# Altium PCB PCB1.PcbDoc (part 1 of 2)
Units mil, origin at the board's own origin, x right, y up, seen from the top; angles counter-clockwise.
Board outline 3950.01 x 3140.03 mil, 2 copper layers (Top Layer, Bottom Layer); 178 components, 190 nets, 658 pads, 218 vias.
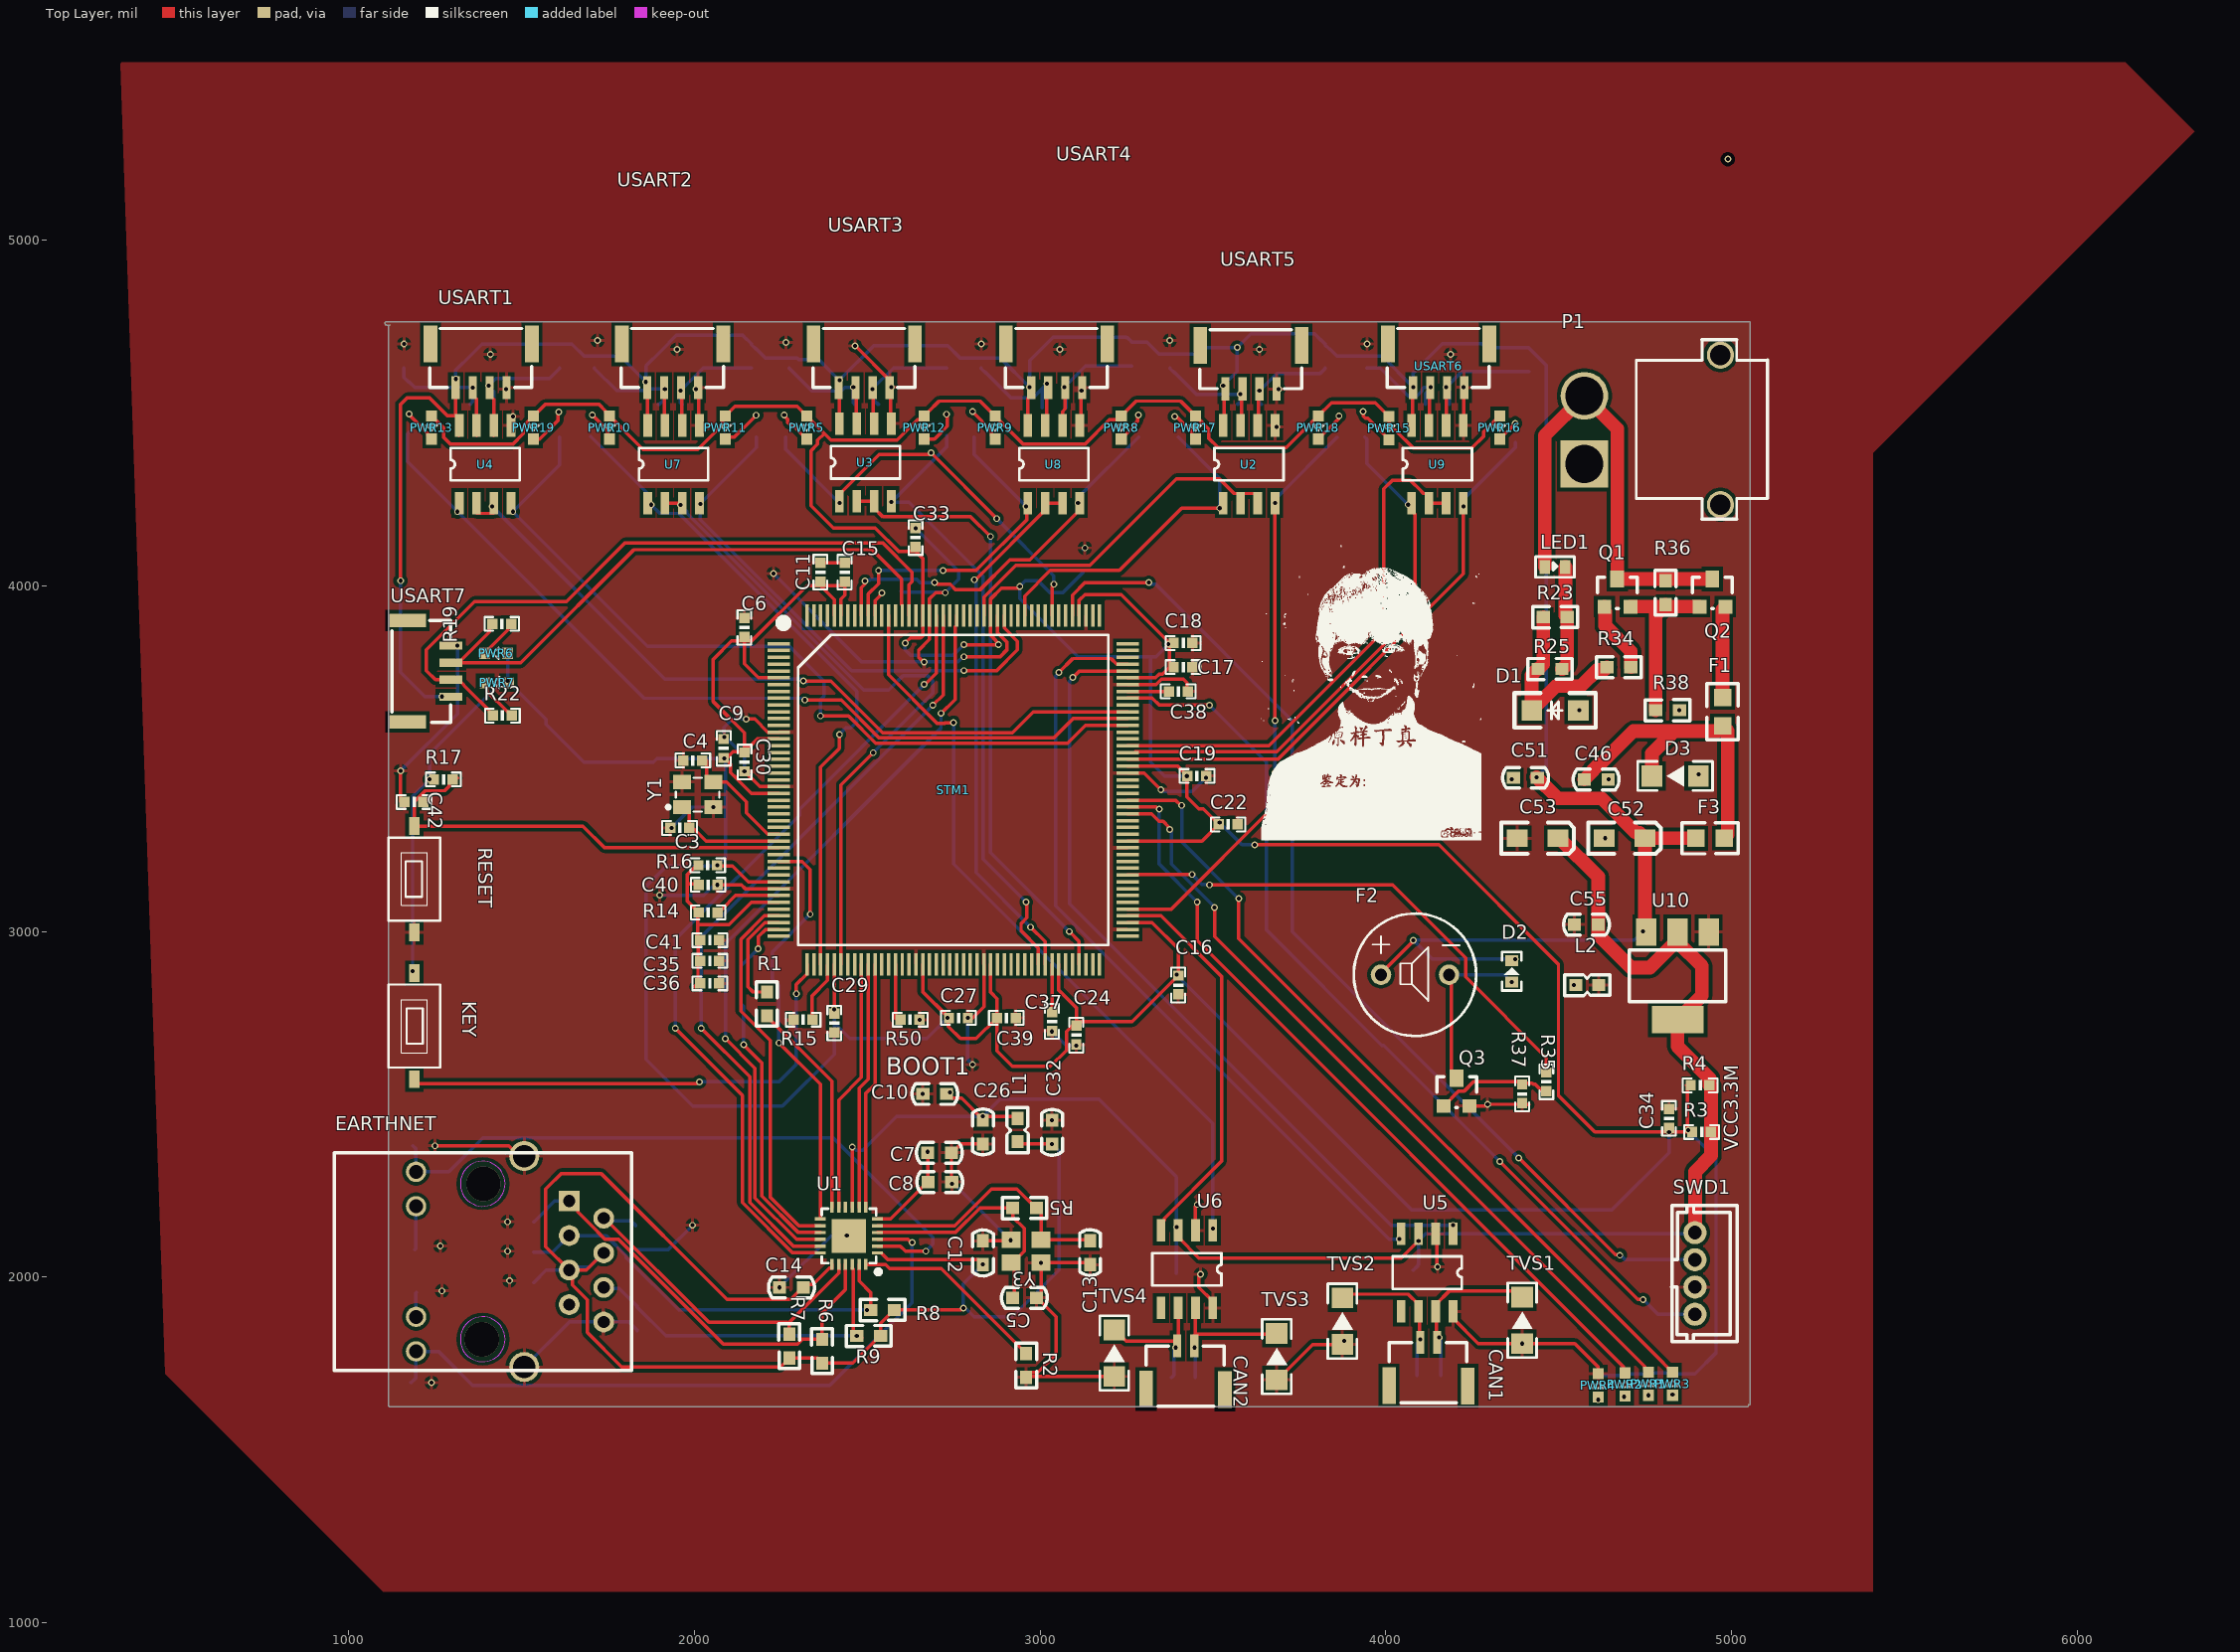
[diagram p0: Top Layer view]
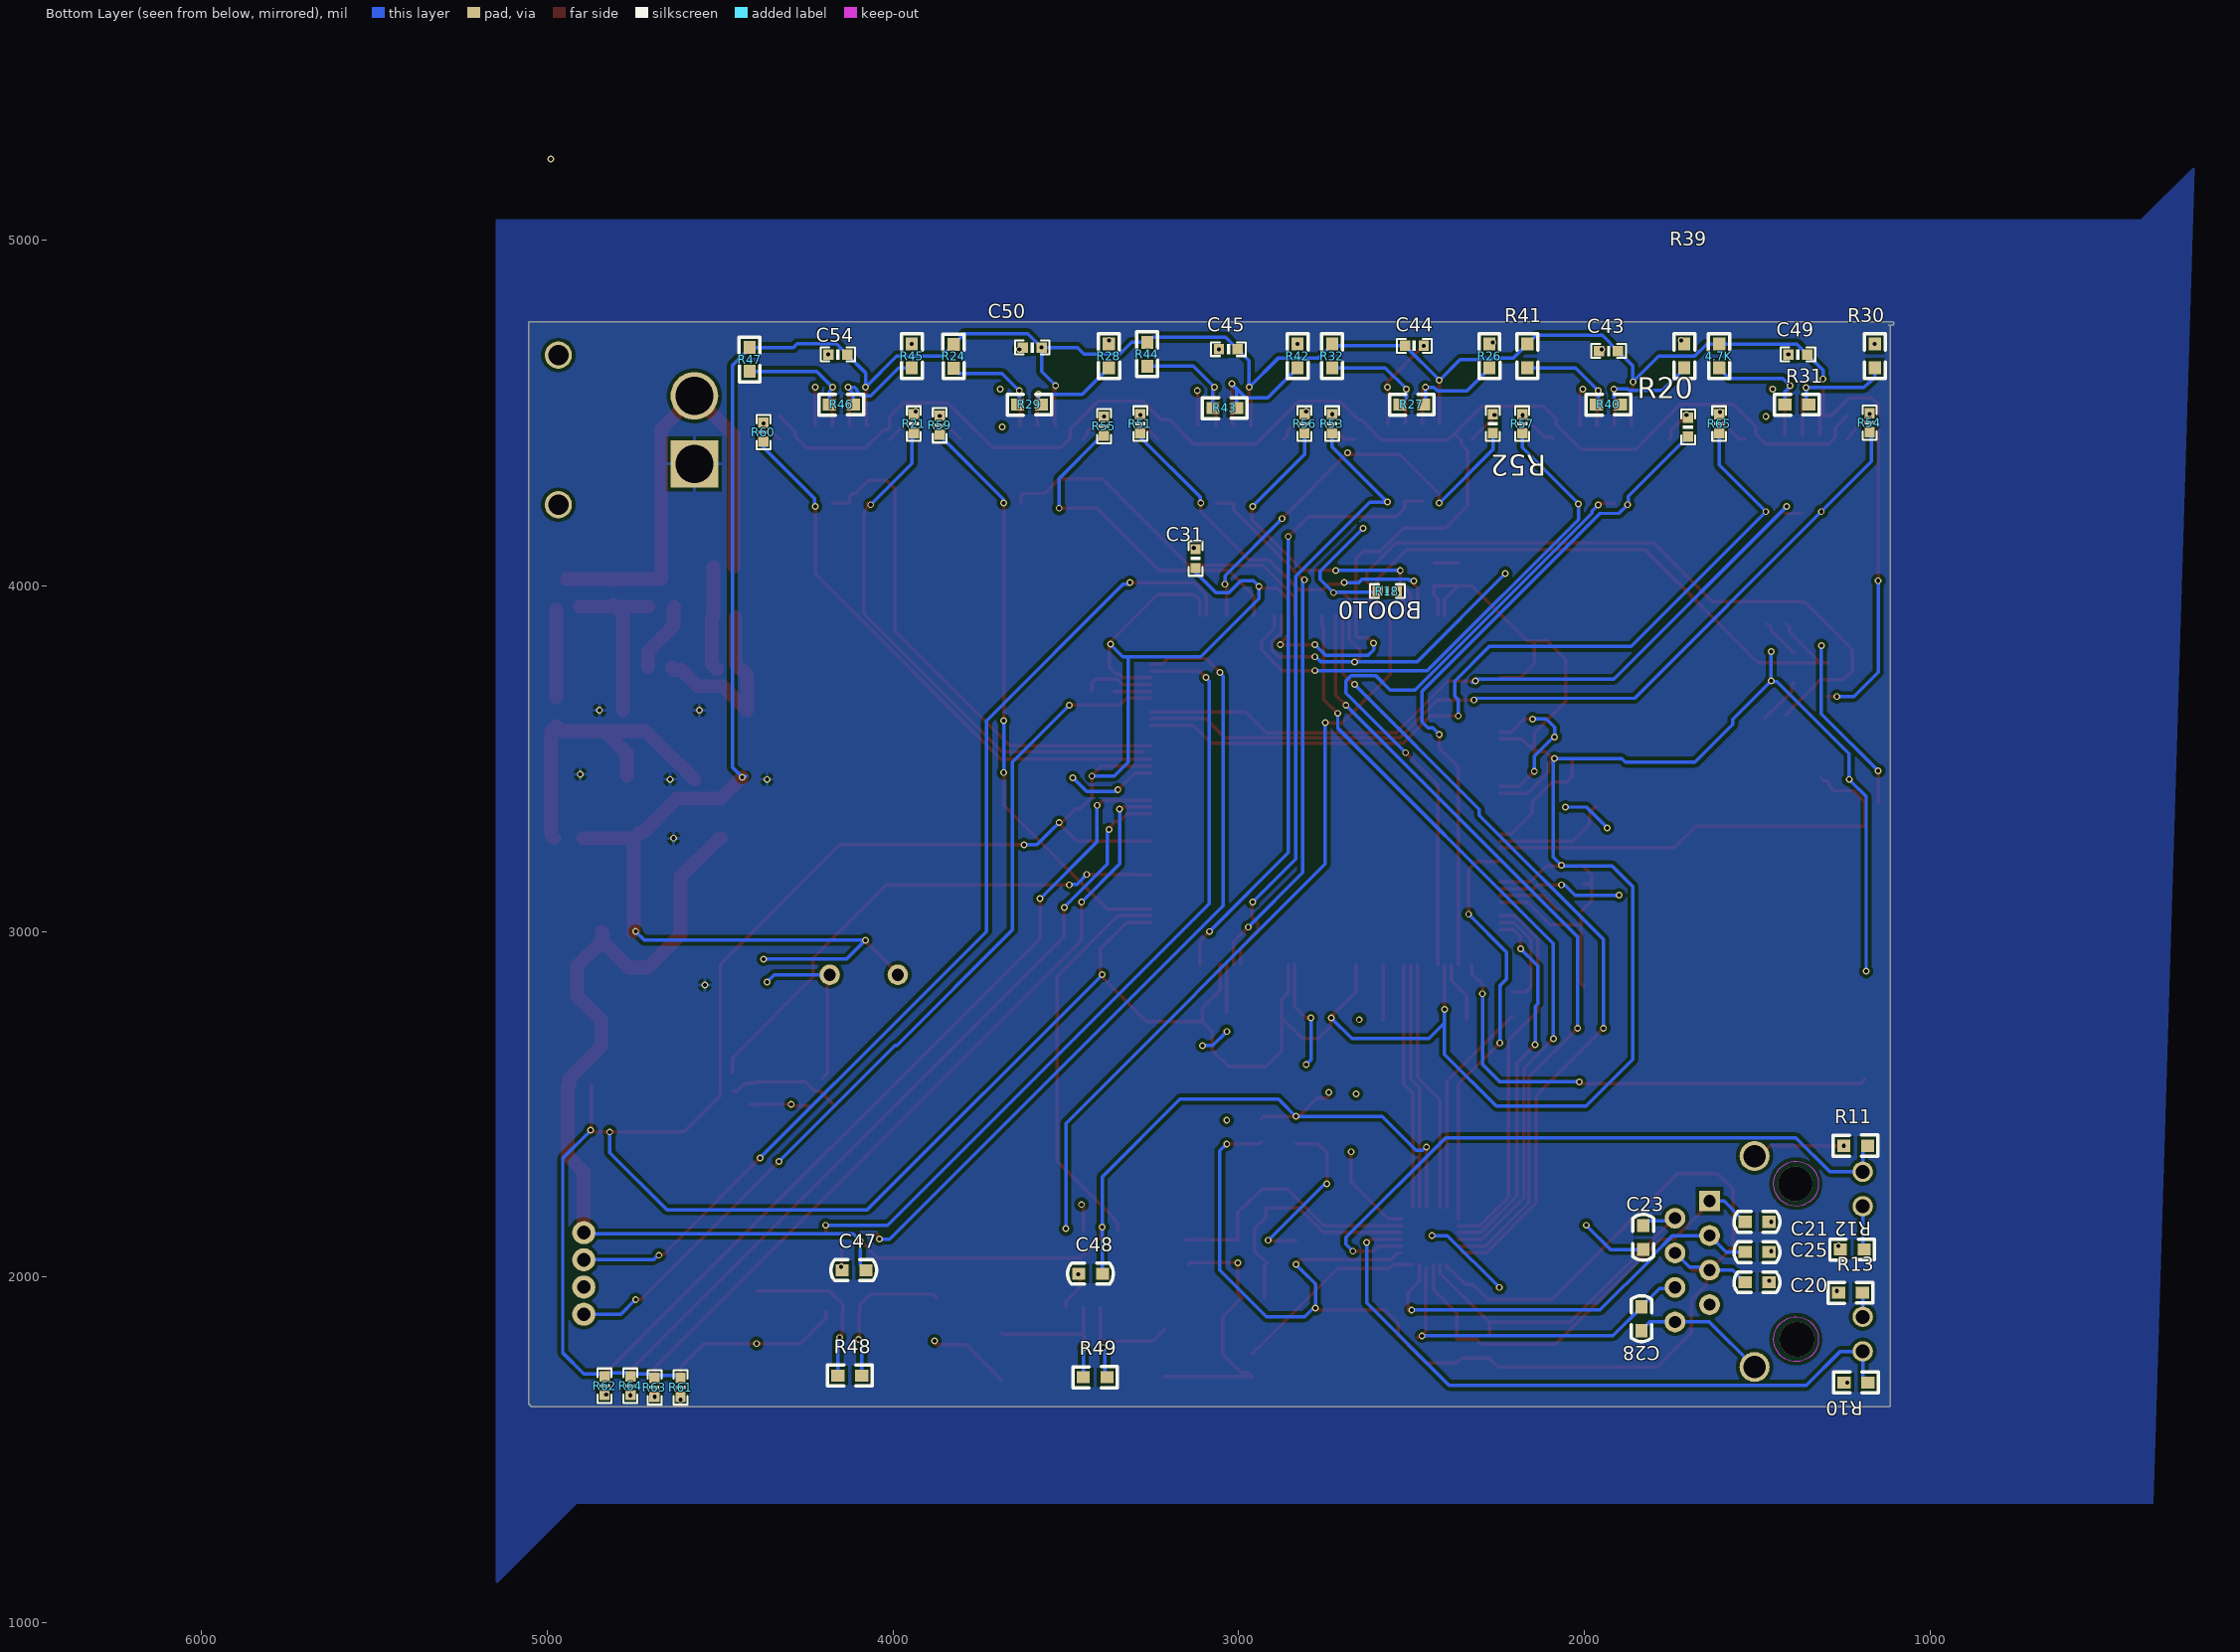
[diagram p1: Bottom Layer view, seen from below]

## Layer stack, top to bottom
Top Solder: solder mask 0.4, Solder Resist, Dk 3.5
Top Layer: signal copper 1.4
Dielectric 1: dielectric 12.6, FR-4, Dk 4.8
Bottom Layer: signal copper 1.4
Bottom Solder: solder mask 0.4, Solder Resist, Dk 3.5

## Board outline
1114.98,4750 cw(c1120,4750) 1119.45,4754.98 1110,4754.98 cw(c1110,4760) 1110,4765.02 5050,4765.02 cw(c5050,4760) 5055.02,4760 5055.02,1635 cw(c5050,1635) 5050.02,1629.98 cw(c5045,1630) 5045,1624.98 1120,1624.98 cw(c1120,1630) 1114.98,1630

## Design rules (kind name [scope] priority, off if disabled: settings)
Clearance [All] p1: gap=10 ignorepadtopadclearanceinfootprint=FALSE except(0: Arc-Hole Track-Hole SMDPad-Hole THPad-Hole Via-Hole Fill-Hole Poly-Hole Region-Hole Text-Hole; 5: Arc-Arc Arc-Track Arc-SMDPad Arc-THPad Arc-Via Track-Track Track-SMDPad Track-THPad Track-Via SMDPad-SMDPad SMDPad-THPad SMDPad-Via THPad-THPad THPad-Via)
HoleSize [All] p1: absolutevalues=TRUE maxlimit=393.7 minlimit=1 maxpercent=80.000 minpercent=20.000
HoleToHoleClearance [All] p1: gap=17.72 allowstackedmicrovias=TRUE
MinimumSolderMaskSliver [All] p1: minsoldermaskwidth=3.15
PolygonConnect [All] p1: connectstyle=Relief reliefconductorwidth=10 reliefentries=4 polygonreliefangle="90 Angle" airgapwidth=10
RoutingVias [All] p1: holewidth=28 width=50 viastyle="Through Hole" minholewidth=7.87 minwidth=50 maxholewidth=28 maxwidth=50
SilkToSilkClearance [All] p1: silktosilkclearance=0
SilkToSolderMaskClearance [IsPad] p1: minsilkscreentomaskgap=0 clearancetoexposedcopper=TRUE
SolderMaskExpansion [All] p1: expansion=4 istentingtop=FALSE
UnRoutedNet [All] p1: checkbadconnections=TRUE
Width [All] p1: maxlimit=50 minlimit=10 preferedwidth=10 minimp=50.000000 maximp=50.000000 favimp=50.000000
24 further rules are at their usual default settings.

## Components (designator, comment, footprint, x,y, rotation, side; value= is the part's Value field where it differs from the comment)
4.7K "4.7K" R_0603 1610,4700 r270 bottom
C3 "22pf" 0603P 1957.5,3300.06 r0 top
C4 "22pf" 0603P 1995.63,3495 r0 top
C5 "22pF" C_0603 2990,1940 r180 top
C6 "0.1uf" 0603P 2145,3880 r270 top
C7 "100nF" C_0603 2744,2360 r180 top
C8 "10uF" C_0603 2745,2275 r180 top
C9 "0.1uf" 0603P 2085,3530 r270 top
C10 "100nF" C_0603 2661,2530 r0 top
C11 "0.1uf" 0603P 2365,4040 r270 top
C12 "100nF" C_0603 2835,2105 r270 top
C13 "22pF" C_0603 3145,2036 r90 top
C14 "100nF" C_0603 2246,1970 r0 top
C15 "0.1uf" 0603P 2435,4040 r270 top
C16 "0.1uf" 0603P 3400,2845 r90 top
C17 "0.1uf" 0603P 3414.37,3765 r180 top
C18 "0.1uf" 0603P 3414.37,3835 r180 top
C19 "0.1uf" 0603P 3454.37,3450 r180 top
C20 "22nF" C_0603 1466,1985 r0 bottom locked
C21 "10pF" C_0603 1466,2160 r0 bottom locked
C22 "0.1uf" 0603P 3544.37,3310 r180 top
C23 "10pF" C_0603 1830,2080 r90 bottom
C24 "0.1uf" 0603P 3105,2700 r90 top
C25 "10pF" C_0603 1466,2072.5 r0 bottom locked
C26 "100nF" C_0603 2835,2385 r90 top
C27 "0.1uf" 0603P 2764.37,2750 r180 top
C28 "10pF" C_0603 1835,1845 r90 bottom
C29 "0.1uf" 0603P 2405,2735 r90 top
C30 "0.1uf" 0603P 2145,3490.63 r90 top
C31 "0.1uf" 0603P 3125,4079.37 r270 bottom
C32 "10uF" C_0603 3035,2454 r270 top
C33 "0.1uf" 0603P 2640,4140 r270 top
C34 "0.1uf" 0603P 4820,2459.37 r270 top
C35 "10UF" 0603P 2045,2915 r180 top
C36 "0.1uf" 0603P 2045,2850 r180 top
C37 "2.2UF" 0603P 3035,2740 r270 top
C38 "2.2UF" 0603P 3400,3695 r0 top
C39 "0.1uf" 0603P 2902.5,2750.06 r0 top
C40 "0.1uf" 0603P 2040,3135 r180 top
C41 "2.2UF" 0603P 2045,2975 r180 top
C42 "0.1uf" 0603P 1189.37,3375 r180 top
C43 "104" 0603P 1930,4680 r0 bottom
C44 "104" 0603P 2492.5,4695.06 r180 bottom
C45 "104" 0603P 3030,4685 r0 bottom
C46 "10uF" C_0603 4644,3440 r180 top
C47 "100nF" C_0603 4079,2020 r0 bottom
C48 "100nF" C_0603 3394,2010 r0 bottom
C49 "104" 0603P 1382.5,4669.94 r0 bottom
C50 "104" 0603P 3597.5,4689.94 r0 bottom
C51 "10uF" C_0603 4370,3445 r0 top
C52 "47uf" C_A3216 4691,3270 r180 top
C53 "47uf" C_A3216 4440,3270 r180 top
C54 "104" 0603P 4160,4670 r0 bottom
C55 "10uF" C_0603 4546,3020 r0 top
CAN1 "Header 2" BM02B-GHS-TBT 4100,1810.98 r0 top
CAN2 "Header 2" BM02B-GHS-TBT 3397.2,1800.98 r0 top
D1 "ZMM6V8" LL-34 4490,3640 r270 top
D2 "Diode" D_SOD_523 4365,2885 r90 top
D3 "SMF5.0A" D_SOD_123 4837.58,3450 r180 top
EARTHNET "RJ45" HR911105A 1387.91,2045 r90 top locked
F1 "FUSE_1A" R_0805 4974.8,3677.3 r270 top
F2 "蜂鸣器" BP_9055 4085,2875 r0 top
F3 "FUSE_0.5A" R_0805 4980,3270 r180 top
KEY "KEY_M" KEY_SOP3625 1190,2572.91 r90 top
L1 "220R,2.0A,0.05DCR" L_0603 2935,2420 r90 top
L2 "3.3uH" L_0603 4578,2845 r0 top
LED1 "LED" 0603LED 4459.5,4056.59 r0 top
P1 "P_PW_XT30_male" XT30(Male) 4575,4353.15 r90 top
PWR1 "LED" SMDLED-0603 4760,1658.07 r90 top
PWR2 "LED" SMDLED-0603 4692.5,1655.57 r90 top
PWR3 "LED" SMDLED-0603 4830,1658.07 r90 top
PWR4 "LED" SMDLED-0603 4615,1653.07 r90 top
PWR5 "LED" SMDLED-0603 2325,4491.93 r270 top
PWR6 "LED" SMDLED-0603 1460,3805 r180 top
PWR7 "LED" SMDLED-0603 1461.93,3720 r180 top
PWR8 "LED" SMDLED-0603 3235,4491.93 r270 top
PWR9 "LED" SMDLED-0603 2870,4491.93 r270 top
PWR10 "LED" SMDLED-0603 1755,4491.93 r270 top
PWR11 "LED" SMDLED-0603 2090,4491.93 r270 top
PWR12 "LED" SMDLED-0603 2665,4491.93 r270 top
PWR13 "LED" SMDLED-0603 1240,4491.93 r270 top
PWR15 "LED" SMDLED-0603 4010,4490 r270 top
PWR16 "LED" SMDLED-0603 4330,4491.93 r270 top
PWR17 "LED" SMDLED-0603 3450,4491.93 r270 top
PWR18 "LED" SMDLED-0603 3805,4491.93 r270 top
PWR19 "LED" SMDLED-0603 1535,4491.93 r270 top
Q1 "MMBT2907ALT1G" SOT_23 4633,3940 r0 top
Q2 "3401" SOT_23 4908,3940 r0 top
Q3 "9013" SOT_23 4168,2495 r0 top
R1 "510R" R_0603 2210,2825 r270 top
R2 "12.1K" R_0603 2960,1710 r90 top
R3 "0R" 0603P 4914.37,2420 r180 top
R4 "0R" 0603P 4910,2555 r180 top
R5 "1M" R_0603 2921,2200 r0 top
R6 "49.9R" R_0603 2370,1820 r270 top locked
R7 "49.9R" R_0603 2275,1835 r270 top locked
R8 "49.9R" R_0603 2510,1905 r0 top
R9 "49.9R" R_0603 2470,1830 r0 top
R10 "10K" R_0603 1180,1695 r0 bottom
R11 "10K" R_0603 1181,2380 r0 bottom
R12 "510R" R_0603 1260,2080 r180 bottom
R13 "510R" R_0603 1265,1955 r180 bottom
R14 "10R" 0603P 2040,3055 r180 top
R15 "10k" 0603P 2315,2745 r180 top
R16 "10R" 0603P 2038.99,3191.85 r0 top
R17 "10k" 0603P 1274.37,3440 r180 top
R18 "100k" 0603P 2570,3985 r0 bottom
R19 "4.7K" 0603P 1443,3890 r180 top
R20 "4.7K" 0603P 1700,4460 r270 bottom
R21 "4.7K" 0603P 3940,4470 r270 bottom
R22 "4.7K" 0603P 1445,3625 r180 top
R23 "120Ω" R_0603 4456,3910 r0 top
R24 "4.7K" R_0603 3825,4699 r270 bottom
R25 "120Ω" R_0603 4441,3760 r0 top
R26 "4.7K" R_0603 2275,4631 r90 bottom
R27 "120Ω" R_0603 2534,4525 r180 bottom
R28 "4.7K" R_0603 3376,4631 r90 bottom
R29 "120Ω" R_0603 3640,4525 r180 bottom
R30 "4.7K" R_0603 1160,4631 r90 bottom
R31 "120Ω" R_0603 1420,4525 r180 bottom
R32 "4.7K" R_0603 2730,4700 r270 bottom
R34 "23.7K" R_0603 4640,3765 r0 top
R35 "1K" 0603P 4465,2565 r270 top
R36 "23.7K" R_0603 4810,4015 r270 top
R37 "10K" 0603P 4395,2530 r90 top
R38 "23.7K" R_0603 4850,3640 r180 top
R39 "4.7K" R_0603 1711,4631 r90 bottom
R40 "120Ω" R_0603 1965,4525 r180 bottom
R41 "4.7K" R_0603 2165,4700 r270 bottom
R42 "4.7K" R_0603 2830,4631 r90 bottom
R43 "120Ω" R_0603 3075,4515 r180 bottom
R44 "4.7K" R_0603 3265,4705 r270 bottom
R45 "4.7K" R_0603 3946,4631 r90 bottom
R46 "120Ω" R_0603 4184,4525 r180 bottom
R47 "4.7K" R_0603 4415,4690 r270 bottom
R48 "120Ω" R_0603 4091,1715 r0 bottom
R49 "120Ω" R_0603 3381,1710 r0 bottom
R50 "100k" 0603P 2624.37,2745 r180 top
R51 "4.7K" 0603P 3285,4470 r270 bottom
R52 "4.7K" 0603P 2265,4470 r270 bottom
R53 "4.7K" 0603P 2730,4470 r270 bottom
R54 "4.7K" 0603P 1174.94,4472.5 r270 bottom
R55 "4.7K" 0603P 3389.94,4462.5 r270 bottom
R56 "4.7K" 0603P 2810,4470 r270 bottom
R57 "4.7K" 0603P 2180,4470 r270 bottom
R59 "4.7K" 0603P 3865,4465 r270 bottom
R60 "4.7K" 0603P 4375,4445 r270 bottom
R61 "10k" 0603P 4615,1680.63 r90 bottom
R62 "10k" 0603P 4835,1685.63 r90 bottom
R63 "10k" 0603P 4690,1680.63 r90 bottom
R64 "10k" 0603P 4760,1685.63 r90 bottom
R65 "4.7K" 0603P 1610,4470 r270 bottom
RESET "KEY_M" KEY_SOP3625 1190,3305 r270 top
STM1 "STM32H743IIT6" LQFP176 2244.67,3832.78 r0 top locked
SWD1 "Header 4" HDR_2.0_4pin 4895,1892.52 r90 top
TVS1 "TVS" D_SOD_123 4395,1875 r90 top
TVS2 "TVS" D_SOD_123 3875,1872.58 r90 top
TVS3 "TVS" D_SOD_123 3685,1770 r90 top
TVS4 "TVS" D_SOD_123 3215,1780 r90 top
U1 "LAN8720A" QFN24 2447.28,2119.21 r180 top
U2 "SP3485" SOP-8 3530,4240 r90 top
U3 "SP3485" SOP-8 2420,4245.59 r90 top
U4 "SP3485" SOP-8 1320,4240 r90 top
U5 "TJA1050" SOP-8 4195,2125 r270 top
U6 "TJA1050" SOP-8 3500,2135 r270 top
U7 "SP3485" SOP-8 1865,4240 r90 top
U8 "SP3485" SOP-8 2965,4240 r90 top
U9 "SP3485" SOP-8 4075,4240 r90 top
U10 "1117-3.3" SOT_223 4846.88,2868.54 r180 top
USART1 "Header 4" BM04B-GHS-TBT 1530,4700 r180 top locked
USART2 "Header 4" BM04B-GHS-TBT 2084,4700 r180 top locked
USART3 "Header 4" BM04B-GHS-TBT 2638,4700 r180 top locked
USART4 "Header 4" BM04B-GHS-TBT 3195,4700 r180 top locked
USART5 "Header 4" BM04B-GHS-TBT 3757.05,4695.98 r180 top locked
USART6 "Header 4" BM04B-GHS-TBT 4300,4700 r180 top
USART7 "Header 4" BM04B-GHS-TBT 1170,3900 r270 top
Y1 "25Mhz" XTAL3225 1964.45,3360 r0 top
Y3 "25Mhz" XTAL_3225 2960,2075 r0 top

## Footprints (in the part's own frame and the unit in brackets; to place one, negate y for a bottom-side part, rotate by r counter-clockwise, add the part's x,y. Pads: shape width x height; smd on the part's side, far side on the other; paste and mask are expansions set on the pad)
0603LED [mil]
  rect 30x40 smd: 1(0.5,-1.59) 2(60.5,-1.59)
  silkscreen extent -26,-32 87,28, body extent -2,-16 62,16, height 24
0603P [mil]
  rect 30x30 smd: 1(-27,0) 2(27.5,-0.06)
  silkscreen extent -50,-20 50,20
BM02B-GHS-TBT [mm]
  rect 1x2.7 smd: 0(-2.286,-3.175) 0(3.5,-3.2)
  rect 0.6x1.7 smd: 1(1.25,0) 2(0,0)
  silkscreen extent -2.29,-4.44 3.43,0
BM04B-GHS-TBT [mm]
  rect 1x2.7 smd: 0(0,0) 0(7.45,0)
  rect 0.6x1.7 smd: 1(5.6,3.2) 2(4.35,3.2) 3(3.1,3.2) 4(1.85,3.2)
  silkscreen extent 0,-1.14 7.49,3.18
BP_9055 [mm]
  round 1.5 hole 0.9: 1(-2.5,0) 2(2.5,0)
  silkscreen extent -4.5,-4.5 4.5,4.5, body extent -4.5,-4.5 4.5,4.5, height 6
C_0603 [mil] "1608"
  rect 38x35 smd: 1(0,0) 2(69,0)
  silkscreen extent -31,-30 101,30, body extent 4,-16 67,16, height 12
C_A3216 [mil]
  rect 60x51.18 smd: 1(-59,0) 2(59,0)
  silkscreen extent -105,-45 105,45, body extent -63,-31 63,32, height 63
D_SOD_123 [mm] "1206大小，二极管"
  rect 1.52x1.6 smd: 1(-1.713,0) 2(1.712,0)
  silkscreen extent -2.74,-1.07 2.74,1.07, body extent -1.87,-0.75 2.13,0.75, height 1.5
D_SOD_523 [mm] "0603大小，二极管"
  rect 0.8x0.96 smd: 1(-0.79,0) 2(0.79,0)
  silkscreen extent -1.42,-0.71 1.42,0.71
HDR_2.0_4pin [mm]
  round 1.7 hole 1: 1(6,0) 2(4,0) 3(2,0) 4(0,0)
  silkscreen extent -2,-3.1 8,1.71
HR911105A [mil]
  rect 60x60 hole 35: 1(175.2,-250)
  round 60 hole 35: 2(125.2,-350) 3(75.2,-250) 4(25.2,-350) 5(-24.8,-250) 6(-74.8,-350) 7(-124.8,-250) 8(-174.8,-350)
  round 59.06 hole 40.16: 9(259.84,192.91) 12(-259.84,192.91)
  round 59.05 hole 40.16: 10(160,192.91) 11(-160,192.91)
  round 86.61 hole 64.96: 13(305.12,-120) 14(-305.12,-120)
  Keep-Out Layer circle w2: c225.04,0 r64.96
  Keep-Out Layer circle w2: c-224.96,0 r64.96
  silkscreen extent -315,-430 315,430
KEY_SOP3625 [mm]
  rect 1.3x0.8 smd: 1(0,0) 2(7.8,0)
  silkscreen extent 0.85,-1.9 6.95,1.9
L_0603 [mil]
  rect 38x35 smd: 1(-28,0) 2(38.87,0)
  silkscreen extent -60,-31 71,30, body extent -24,-15 36,15, height 20
LL-34 [mm]
  rect 1.5x1.5 smd: 1(0,1.714) 2(0,-1.714)
  silkscreen extent -1.27,-2.98 1.27,2.98, body extent -0.73,-1.75 0.72,1.75, height 1.43
LQFP176 [mm]
  rect 1.65x0.254 smd: 1(0,0) 2(0,-0.5) 3(0,-1) 4(0,-1.5) 5(0,-2) 6(0,-2.5) 7(0,-3) 8(0,-3.5) 9(0,-4) 10(0,-4.5) 11(0,-5) 12(0,-5.5) 13(0,-6) 14(0,-6.5) 15(0,-7) 16(0,-7.5) 17(0,-8) 18(0,-8.5) 19(0,-9) 20(0,-9.5) 21(0,-10) 22(0,-10.5) 23(0,-11) 24(0,-11.5) 25(0,-12) 26(0,-12.5) 27(0,-13) 28(0,-13.5) 29(0,-14) 30(0,-14.5) 31(0,-15) 32(0,-15.5) 33(0,-16) 34(0,-16.5) 35(0,-17) 36(0,-17.5) 37(0,-18) 38(0,-18.5) 39(0,-19) 40(0,-19.5) 41(0,-20) 42(0,-20.5) 43(0,-21) 44(0,-21.5) 89(25.631,-21.5) 90(25.631,-21) 91(25.631,-20.5) 92(25.631,-20) 93(25.631,-19.5) 94(25.631,-19) 95(25.631,-18.5) 96(25.631,-18) 97(25.631,-17.5) 98(25.631,-17) 99(25.631,-16.5) 100(25.631,-16) 101(25.631,-15.5) 102(25.631,-15) 103(25.631,-14.5) 104(25.631,-14) 105(25.631,-13.5) 106(25.631,-13) 107(25.631,-12.5) 108(25.631,-12) 109(25.631,-11.5) 110(25.631,-11) 111(25.631,-10.5) 112(25.631,-10) 113(25.631,-9.5) 114(25.631,-9) 115(25.631,-8.5) 116(25.631,-8) 117(25.631,-7.5) 118(25.631,-7) 119(25.631,-6.5) 120(25.631,-6) 121(25.631,-5.5) 122(25.631,-5) 123(25.631,-4.5) 124(25.631,-4) 125(25.631,-3.5) 126(25.631,-3) 127(25.631,-2.5) 128(25.631,-2) 129(25.631,-1.5) 130(25.631,-1) 131(25.631,-0.5) 132(25.631,0)
  rect 0.254x1.65 smd: 45(2.065,-23.566) 46(2.566,-23.566) 47(3.066,-23.566) 48(3.565,-23.566) 49(4.066,-23.566) 50(4.565,-23.566) 51(5.066,-23.566) 52(5.565,-23.566) 53(6.066,-23.566) 54(6.565,-23.566) 55(7.066,-23.566) 56(7.565,-23.566) 57(8.066,-23.566) 58(8.565,-23.566) 59(9.066,-23.566) 60(9.565,-23.566) 61(10.066,-23.566) 62(10.565,-23.566) 63(11.066,-23.566) 64(11.565,-23.566) 65(12.066,-23.566) 66(12.565,-23.566) 67(13.066,-23.566) 68(13.565,-23.566) 69(14.066,-23.566) 70(14.565,-23.566) 71(15.066,-23.566) 72(15.566,-23.566) 73(16.066,-23.566) 74(16.566,-23.566) 75(17.065,-23.566) 76(17.566,-23.566) 77(18.065,-23.566) 78(18.566,-23.566) 79(19.065,-23.566) 80(19.566,-23.566) 81(20.065,-23.566) 82(20.566,-23.566) 83(21.065,-23.566) 84(21.566,-23.566) 85(22.065,-23.566) 86(22.566,-23.566) 87(23.065,-23.566) 88(23.566,-23.566) 133(23.566,2.065) 134(23.065,2.065) 135(22.566,2.065) 136(22.065,2.065) 137(21.566,2.065) 138(21.065,2.065) 139(20.566,2.065) 140(20.065,2.065) 141(19.566,2.065) 142(19.065,2.065) 143(18.566,2.065) 144(18.065,2.065) 145(17.566,2.065) 146(17.065,2.065) 147(16.566,2.065) 148(16.066,2.065) 149(15.566,2.065) 150(15.066,2.065) 151(14.565,2.065) 152(14.066,2.065) 153(13.565,2.065) 154(13.066,2.065) 155(12.565,2.065) 156(12.066,2.065) 157(11.565,2.065) 158(11.066,2.065) 159(10.565,2.065) 160(10.066,2.065) 161(9.565,2.065) 162(9.066,2.065) 163(8.565,2.065) 164(8.066,2.065) 165(7.565,2.065) 166(7.066,2.065) 167(6.565,2.065) 168(6.066,2.065) 169(5.565,2.065) 170(5.066,2.065) 171(4.565,2.065) 172(4.066,2.065) 173(3.565,2.065) 174(3.066,2.065) 175(2.566,2.065) 176(2.065,2.065)
  silkscreen extent 0.04,-22.15 24.22,1.82
QFN24 [mm]
  rect 0.8x0.25 smd: 1(-2.101,1.25) 2(-2.101,0.75) 3(-2.101,0.25) 4(-2.101,-0.25) 5(-2.101,-0.75) 6(-2.101,-1.25) 13(2.101,-1.25) 14(2.101,-0.75) 15(2.101,-0.25) 16(2.101,0.25) 17(2.101,0.75) 18(2.101,1.25)
  rect 0.25x0.8 smd: 7(-1.25,-2.101) 8(-0.75,-2.101) 9(-0.25,-2.101) 10(0.25,-2.101) 11(0.75,-2.101) 12(1.25,-2.101) 19(1.25,2.101) 20(0.75,2.101) 21(0.25,2.101) 22(-0.25,2.101) 23(-0.75,2.101) 24(-1.25,2.101)
  rect 2.5x2.5 smd: 25(0,0)
  silkscreen extent -2.31,-2 2,2.79
R_0603 [mil] "1608"
  rect 38x35 smd: 1(0,0) 2(69,0)
  silkscreen extent -30,-31 99,30, body extent 4,-16 66,16, height 18
R_0805 [mil] "2012"
  rect 50x50 smd: 1(0,0) 2(82.3,0.2)
  silkscreen extent -40,-45 122,45, body extent 1,-24 80,25, height 22
SMDLED-0603 [mil]
  rect 32x32 smd: 1(0,0) 2(66.93,0)
  silkscreen extent 26,-17 42,17
SOP-8 [mil]
  rect 65x25 smd: 1(0,0) 2(0,-50) 3(0,-100) 4(0,-150) 5(224.41,-150) 6(224.41,-100) 7(224.41,-50) 8(224.41,0)
  silkscreen extent 65,-175 159,25
SOT_23 [mil]
  rect 40x40 smd: 1(0,0) 2(75,0)
  rect 40x50 smd: 3(37,80)
  silkscreen extent -20,-5 95,85, body extent -20,-12 94,99, height 47
SOT_223 [mil]
  rect 59x79 smd: 1(-88,-130) 2(2.55,-130) 3(93.1,-130)
  rect 150x79 smd: 2(1.88,123.54)
  silkscreen extent -137,-78 143,72, body extent -126,-139 130,135, height 67
XT30(Male) [mm] "XT30公头"
  round 2 hole 1.5: 0(-3,-10) 0(8,-10)
  round 3.5 hole 2.8: 1(5,0)
  rect 3.5x3.5 hole 2.8: 2(0,0)
  silkscreen extent -4.06,-13.47 9.14,-3.82, body extent -4.11,-13.49 9.19,1.52, height 5
XTAL3225 [mm]
  rect 1.3x1.05 smd: 1(0,0) 2(2.3,0) 3(2.3,1.85) 4(0,1.85)
  silkscreen extent -1.14,-0.33 2.74,2.17
XTAL_3225 [mm]
  rect 1.4x1.2 smd: 1(-1.1,-0.85) 2(1.1,-0.85) 3(1.1,0.85) 4(-1.1,0.85)
  body extent -1.6,-1.25 1.6,1.25, height 0.7

## Part data
4.7K R23 R24 R25 R26 R27 R28 R29 R30 R31 R32 R39 R40 R41 R42 R43 R44 R45 R46 R47 R48 R49: library part Res2, "Resistor", LatestRevisionDate=17-Jul-2002, LatestRevisionNote="Re-released for DXP Platform.", PackageReference=AXIAL-0.4, Published=8-Jun-2000, Publisher="Altium Limited"
C3 C4 C5 C6 C7 C8 C9 C10 C11 C12 C13 C14 C15 C16 C17 C18 C19 C20 C21 C22 C23 C24 C25 C26 C27 C28 C29 C30 C31 C32 C33 C34 C35 C36 C37 C38 C39 C40 C41 C42 C43 C44 C45 C49 C50 C54: library part C
C46 C51 C55: library part Cap_4, "Capacitor", LatestRevisionDate=17-Jul-2002, LatestRevisionNote="Re-released for DXP Platform.", PackageDescription="Radial Cap, Thru-Hole; 2 Leads; 0.3 in Pin Spacing", PackageReference=RAD-0.3, Published=8-Jun-2000, Publisher="Altium Limited"
C47 C48: library part Cap_2, "Capacitor", LatestRevisionDate=17-Jul-2002, LatestRevisionNote="Re-released for DXP Platform.", PackageDescription="Radial Cap, Thru-Hole; 2 Leads; 0.3 in Pin Spacing", PackageReference=RAD-0.3, Published=8-Jun-2000, Publisher="Altium Limited"
C52 C53: library part "Cap Pol", "Polarized Capacitor (Radial)", LatestRevisionDate=17-Jul-2002, LatestRevisionNote="Re-released for DXP Platform.", PackageReference=RB7.6-15, Published=8-Jun-2000, Publisher="Altium Limited"
CAN1 CAN2: "Header, 2-Pin", LatestRevisionDate=17-Jul-2002, LatestRevisionNote="Re-released for DXP Platform.", Publisher="Altium Limited"
D1: library part Diode_1, "Default Diode", Code_JEDEC=DO-214-AB, LatestRevisionDate=17-Jul-2002, LatestRevisionNote="Re-released for DXP Platform.", PackageDescription="DO-214-AB/SMC; 2 C-Bend Leads; Body 7.9 x 5.9 mm, inc. leads (LxW)", PackageReference=SMC, PackageVersion=Sep-1996, Published=8-Jun-2000, Publisher="Altium Limited"
D2: "Default Diode", Code_JEDEC=DO-214-AB, LatestRevisionDate=17-Jul-2002, LatestRevisionNote="Re-released for DXP Platform.", PackageDescription="DO-214-AB/SMC; 2 C-Bend Leads; Body 7.9 x 5.9 mm, inc. leads (LxW)", PackageReference=SMC, PackageVersion=Sep-1996, Published=8-Jun-2000, Publisher="Altium Limited"
D3: library part Diode_2, "Default Diode", Code_JEDEC=DO-214-AB, LatestRevisionDate=17-Jul-2002, LatestRevisionNote="Re-released for DXP Platform.", PackageDescription="DO-214-AB/SMC; 2 C-Bend Leads; Body 7.9 x 5.9 mm, inc. leads (LxW)", PackageReference=SMC, PackageVersion=Sep-1996, Published=8-Jun-2000, Publisher="Altium Limited"
EARTHNET: library part HR911105
F1: library part FUSE_1, "Fuse", LatestRevisionDate=17-Jul-2002, LatestRevisionNote="Re-released for DXP Platform.", PackageDescription="Thru-Hole; 2 Leads", PackageReference=PIN-W2/E2.8, Published=8-Jun-2000, Publisher="Altium Limited"
F3: library part FUSE, "Fuse", LatestRevisionDate=17-Jul-2002, LatestRevisionNote="Re-released for DXP Platform.", PackageDescription="Thru-Hole; 2 Leads", PackageReference=PIN-W2/E2.8, Published=8-Jun-2000, Publisher="Altium Limited"
L1: library part L
L2: library part Inductor, "Inductor", Code_IEC=1005, Code_JEITA=0402, LatestRevisionDate=17-Jul-2002, LatestRevisionNote="Re-released for DXP Platform.", PackageReference=0402-A, Published=8-Jun-2000, Publisher="Altium Limited"
LED1: "Typical INFRARED GaAs LED", LatestRevisionDate=08-Jul-2005, LatestRevisionNote="Mech Layer 1 removed.", PackageDescription="LED; 2 Leads", PackageReference=LED-0, Published=8-Jun-2000, Publisher="Altium Limited"
P1: "XT30_pw_m  / XT30母头电源输入"
Q1: library part PNP, "PNP Bipolar Transistor", LatestRevisionDate=29-May-2009, LatestRevisionNote="IPC-7351 Footprint Added.", PackageDescription="3-Pin SOT-23 Package 0.95 mm Pitch, 2.4 mm Lead Span", PackageReference=SOT-23B, PackageVersion=Aug-1999, Published=8-Jun-2000, Publisher="Altium Limited"
Q2: library part MOSFET_P, "HEXFET Power MOSFET", ComponentLink1Description="Manufacturer Link", ComponentLink1URL=http://www.irf.com/, ComponentLink2Description=Datasheet, ComponentLink2URL=http://www.irf.com/product-info/datasheets/data/irf1010ns.pdf, DatasheetVersion=May-1999, LatestRevisionDate=20-Nov-2009, LatestRevisionNote="IPC-7351 Footprint Added.", PackageDescription="3-Pin Transistor Outline Package 2.54 mm Pitch, 15.1 mm Lead Span", PackageReference=D2PAK, Published=8-Jun-2000, Publisher="Altium Limited"
Q3: library part NPN, "NPN Bipolar Transistor", Code_JEDEC=TO-226-AA, LatestRevisionDate=17-Jul-2002, LatestRevisionNote="Re-released for DXP Platform.", PackageReference=TO-226, Published=8-Jun-2000, Publisher="Altium Limited"
R1 R2 R3 R4 R5 R6 R7 R8 R9 R10 R11 R12 R13 R14 R15 R16 R17 R18 R19 R20 R21 R22 R35 R37 R50 R51 R52 R53 R54 R55 R56 R57 R59 R60 R61 R62 R63 R64 R65: library part R
R34 R36 R38: library part Res2_1, "Resistor", LatestRevisionDate=17-Jul-2002, LatestRevisionNote="Re-released for DXP Platform.", PackageReference=AXIAL-0.4, Published=8-Jun-2000, Publisher="Altium Limited"
SWD1 USART1 USART2 USART3 USART4 USART5 USART6 USART7: "Header, 4-Pin", LatestRevisionDate=17-Jul-2002, LatestRevisionNote="Re-released for DXP Platform.", Publisher="Altium Limited"
TVS1 TVS2 TVS3 TVS4: library part Diode, "Default Diode", Code_JEDEC=DO-214-AB, LatestRevisionDate=17-Jul-2002, LatestRevisionNote="Re-released for DXP Platform.", PackageDescription="DO-214-AB/SMC; 2 C-Bend Leads; Body 7.9 x 5.9 mm, inc. leads (LxW)", PackageReference=SMC, PackageVersion=Sep-1996, Published=8-Jun-2000, Publisher="Altium Limited"
U1: library part LAN8720, "ETH PHY"
U2 U3 U4 U7 U8 U9: library part MAX3485
U5 U6: library part SN65HVD230D
U10: library part LM1117-3.3, "800mA Low-Dropout Linear Regulator, 3-pin TO-220", Manufacturer="National Semiconductor", PackageTopMarking=NSUZXYTTE#*LM1117T*3.3, PartNumber=LM1117T-3.3, PowerWise=N, Supplier Part Number 1=9485813, ComponentLink1Description="LM1117 Datasheet", ComponentLink1URL=http://www.national.com/ds/LM/LM1117.pdf, ComponentLink2Description="LM1117 Web Page", ComponentLink2URL=http://www.national.com/pf/LM/LM1117.html, ComponentLink3Description="T03B Package Page", ComponentLink3URL=http://www.national.com/packaging/folders/t03b.html, CompType="LDO IC", DatasheetVersion=Apr-2006, PackageDescription="TO-220, Molded, 3 Lead, Straight", PackageReference=T03B, PackageVersion="revL, Jan-1992", PinCount=3, Published=4-Dec-2008, Publisher="Altium Limited", RoHS=N, Supplier 1=Farnell
Y1 Y3: library part XTAL_3225, "3225贴片无源晶振"

## Via types
v1: diameter 19.68, hole 11.81, Top Layer to Bottom Layer, 216 vias
v2: diameter 100, hole 100, Top Layer to Bottom Layer, 2 vias

## Nets (pads, with @x,y where several pads share a name; then routed paths per layer and width w, separated by ;. In a path a pad name is that pad's centre, name@x,y a point inside that pad or via, vN(x,y) a via of type N, cw(c..) or ccw(c..) an arc to the next point about the centre after c; other vN are vias at no path point)
5V: 4.7K.1 C43.1 C44.1 C45.1 C49.1 C50.1 C51.2 C52.1 C54.1 D2.2 F2.1 F3.2 R24.1 R32.1 R41.1 R44.1 R47.1 U2.8 U3.8 U4.8 U7.8 U8.8 U9.8 U10.3 USART1.1 USART2.1 USART3.1 USART4.1 USART5.1 USART6.1 USART7.1 | length 8972.7
  Top Layer w10: v1(1150,4015) 1150,4525 1170,4545 1233.07,4545 1286.16,4491.91 U4.8@1309.53,4491.91 ; v1(1270,3680) 1295.51,3680 USART7.1@1295.98,3679.53 ; USART1.1@1309.53,4574.02 U4.8@1309.53,4491.91 ; U4.8@1315,4459.41 1320,4454.41 U4.8@1320,4434.41 ; U4.8@1320,4464.41 1320,4484.41 1312.5,4491.91 U4.8@1309.53,4491.91 ; v1(1860,4590.34) 1860,4575 1864.26,4570.74 1864.26,4465.14 U7.8@1865,4464.41 ; U3.8@2420,4470 v1(2420,4595) ; U8.8@2965,4464.41 2965,4542.83 2970,4547.83 v1(2970,4575) ; U2.8@3530,4464.41 3533.29,4467.7 3533.29,4566.71 USART5.1@3536.58,4570 3530,4576.58 v1(3530,4580) ; F2.1@3986.58,2875 3986.58,2878.96 4080,2972.38 v1(4080,2975) ; U9.8@4075,4464.41 4077.26,4466.67 4077.26,4572.26 v1(4080,4575)
  Top Layer w39.37: v1(4436.64,3446.64) 4498.28,3385 4625,3385 4724.41,3285.59 4734.41,3285.59 C52.1@4750,3270 ; U10.3@4753.78,2998.54 4750,3002.32 C52.1@4750,3270 ; F3.2@4897.7,3269.8 4897.5,3270 C52.1@4750,3270
  Bottom Layer w10: v1(1150,4015) 1150,3750 1220.47,3679.53 1269.53,3679.53 v1(1270,3680) ; v1(1310,4598.86) 1310,4624.44 C49.1@1355.5,4669.94 1385.56,4700 4.7K.1@1610,4700 1646.25,4700 1681.25,4665 1785.34,4665 v1(1860,4590.34) 1860,4637 C43.1@1903,4680 1948,4725 2140,4725 2151,4714 2152.5,4714 2165,4701.5 R41.1@2165,4700 2165,4698.5 2177.5,4686 2179,4686 2205,4660 2296.64,4660 2301.64,4655 2360,4655 v1(2420,4595) 2420,4595.56 C44.1@2519.5,4695.06 2733.44,4695.06 2768.5,4660 2885,4660 v1(2970,4575) 2970,4652 C45.1@3003,4685 3038,4720 3250,4720 3251,4719 3252.5,4719 3265,4706.5 R44.1@3265,4705 3310,4705 3344,4671 3447.96,4671 3466.9,4689.94 v1(3570.5,4689.94) ; v1(3530,4580) 3570.5,4620.5 v1(3570.5,4689.94) ; v1(4375,2920) 4135,2920 v1(4080,2975) 4720,2975 v1(4745,3000) ; 4425,3450 4428.36,3446.64 v1(4436.64,3446.64) 4465,3475 4465,4638.5 4415,4688.5 R47.1@4415,4690 4288.61,4690 4277.75,4700.86 4163.86,4700.86 C54.1@4133,4670 4080,4617 v1(4080,4575) 3990,4665 3859,4665 3839,4685 3837.5,4685 3825,4697.5 3825,4700.5 3812.5,4713 3811,4713 3794,4730 3610.56,4730 v1(3570.5,4689.94)
+5: C46.2 D3.2 F1.2 F3.1 | length 957.8
  Top Layer w39.37: C46.2@4575,3440 4598.06,3463.06 4598.06,3465.47 4614.78,3482.19 4618.69,3482.19 4716.5,3580 4835,3580 ; D3.2@4770.16,3450 4770.16,3515.16 4835,3580 ; F3.1@4980,3270 4990,3280 4990,3580 F1.2@4975,3595 4960,3580 4835,3580
BLUE: PWR2.2 STM1.108 | length 2283.5
  Top Layer w10: STM1.108@3253.76,3360.34 3336.03,3360.34 3342.38,3353.98 v1(3345,3353.98) ; v1(3454.93,3084.93) 3455,3084.87 3455,2973.33 4688.33,1740 4688.33,1726.67 PWR2.2@4692.5,1722.5
  Bottom Layer w10: v1(3345,3353.98) 3345,3194.87 v1(3454.93,3084.93)
BOOT0: R18.1 STM1.166 | length 80.2
  Top Layer w10: STM1.166@2522.84,3914.09 2522.84,3957.84 v1@2545,3980
  Bottom Layer w10: v1(2542.5,3980.06) 2543,3980.56 R18.1@2543,3985
BYPASS_REG: R15.1 STM1.48 | length 176.2
  Top Layer w10: R15.1@2342,2745 2340,2747 2340,2813.23 2385.04,2858.27 STM1.48@2385.04,2901.76
CAN1_RX: STM1.129 U5.4 | length 2313
  Top Layer w10: v1(3055,3750) 3095,3790 3205.54,3790 3221.82,3773.72 STM1.129@3253.76,3773.72 ; v1(4040,2110) 4045,2115 U5.4@4045,2125
  Bottom Layer w10: v1(3055,3750) 3055,3749.3 3045,3739.3 3045,3075 4010,2110 v1(4040,2110)
CAN1_TX: STM1.128 U5.1 | length 2345.5
  Top Layer w10: v1(3095,3735) 3114.04,3754.04 STM1.128@3253.76,3754.04 ; U5.1@4195,2125 v1(4195,2150)
  Bottom Layer w10: v1(3095,3735) 3095,3734.3 3085,3724.3 3085,3080.86 4015.86,2150 v1(4195,2150)
CAN2_RX: STM1.92 U6.4 | length 1151.4
  Top Layer w10: STM1.92@3253.76,3045.37 3349.63,3045.37 3525,2870 3525,2335 3360,2170 3360,2165 3350,2155 U6.4@3350,2135
CAN2_TX: STM1.164 U6.1 | length 2194.6
  Top Layer w10: STM1.164@2562.21,3914.09 2562.21,3742.79 2703.3,3601.7 2723.69,3601.7 2725.16,3603.16 2748.16,3603.16 v1(2750,3605)
  Bottom Layer w10: v1(2750,3605) 2750,3195 3500,2445 v1(3500,2140)
ETH_MDC: STM1.33 U1.13 | length 1214.7
  Top Layer w10: STM1.33@2244.67,3202.85 2312.15,3202.85 2335,3180 v1(2335,3050) ; v1(2244.84,2677.5) 2364.55,2557.79 U1.13@2364.55,2168.42
  Bottom Layer w10: v1(2244.84,2677.5) 2244.84,2842.64 2225,2862.48 2225,2940 v1(2335,3050)
ETH_MDIO: R1.1 STM1.42 | length 307.6
  Top Layer w10: R1.1@2210,2825 2170,2825 2155,2840 2155,2976.21 2204.48,3025.69 STM1.42@2244.67,3025.69
ETH_RESET: STM1.43 U1.15 | length 1077.4
  Top Layer w10: v1(2142.57,2672.57) 2190,2625.13 2190,2625 2195,2620 2195,2235 2300.95,2129.05 U1.15@2364.55,2129.05 ; v1(2185,2950) 2185,2985 2206,3006 STM1.43@2244.67,3006
  Bottom Layer w10: v1(2142.57,2672.57) 2142.57,2783.81 2135,2791.38 2135,2900 v1(2185,2950)
GND: C46.1 C51.1 C52.2 D1.1 D3.1 L2.1 P1.2 R38.1
  other v1: 4545,2845 4635,3270 4365,3440 4645,3440 4905,3455 4560,3640 4850,3640
GREEN: PWR3.2 STM1.109 | length 2398.6
  Top Layer w10: STM1.109@3253.76,3380.02 3392.36,3380.02 3407.38,3365 v1(3410,3365) ; v1(3575,3095) 3575,2980 4789,1766 4819,1736 PWR3.2@4835.59,1719.41
  Bottom Layer w10: v1(3410,3365) 3410,3260 v1(3575,3095)
In+5: LED1.1 P1.1 Q1.3 Q2.3 R36.1 | length 1399.9
  Top Layer w39.37: LED1.1@4460,4055 4460,4435 4470,4445 4560,4535 4575,4535 P1.1@4575,4550 4670,4455 Q1.3@4670,4020 4805,4020 R36.1@4810,4015 4815,4020 Q2.3@4945,4020
"LINK LED": EARTHNET.12 R10.1 U1.3 | length 1950.7
  Top Layer w10: U1.3@2530,2109.37 2618.01,2109.37 2627.38,2100 v1(2630,2100)
  Bottom Layer w10: R10.1@1180,1695 1181.5,1695 1194,1707.5 1194,1784.16 EARTHNET.12@1195,1785.16 1259.84,1785.16 1358.43,1686.57 2391.57,1686.57 2630,1925 v1(2630,2100)
Net4.7K_2: 4.7K.2 R31.1 U4.6 USART1.3 | length 422.9
  Top Layer w10: USART1.3@1410,4565 1410,4550.31 1420,4540.31 U4.6@1420,4464.41 U4.6@1420,4434.41
  Bottom Layer w10: R31.1@1420,4525 1420,4562.38 1405,4577.38 v1(1405,4580) 1426,4601 1581.5,4601 1610,4629.5 4.7K.2@1610,4631
NetC5_2: C5.2 R5.1 U1.4 Y3.1 | length 715.9
  Top Layer w10: U1.4@2530,2129.05 2755.27,2129.05 2826.21,2200 R5.1@2921,2200 2921.64,2199.36 2921.64,2173.36 2954.25,2140.75 2954.25,2075.16 2920.63,2041.54 Y3.1@2916.69,2041.54 2926,2032.23 C5.2@2926,1940
NetC7_2: C7.2 C8.2 U1.6 | length 275.6
  Top Layer w10: U1.6@2530,2168.42 2567.92,2168.42 2674.5,2275 C8.2@2676,2275 2675,2276 C7.2@2675,2360
  other v1: 2675,2362.66
NetC13_2: C13.2 R5.2 U1.5 Y3.3 | length 777.5
  Top Layer w10: U1.5@2530,2148.74 2753.74,2148.74 2860,2255 2933.5,2255 2988.5,2200 R5.2@2990,2200 2990.81,2200 3003.31,2187.5 Y3.3@3003.31,2108.46 C13.2@3156.54,2108.46
NetCAN1_1: CAN1.1 R48.2 TVS1.2 U5.7 | length 479.7
  Top Layer w10: v1(4155,1825) 4147.11,1832.89 4147.11,1898.48 U5.7@4145,1900.59 4145,1920.59 4185,1960.59 4391.83,1960.59 TVS1.2@4395,1957.42
  Bottom Layer w10: v1(4155,1825) 4155,1822.38 4160,1817.38 R48.2@4160,1715
NetCAN1_2: CAN1.2 R48.1 TVS2.2 U5.6 | length 448.2
  Top Layer w10: TVS2.2@3875,1940 3885.59,1950.59 4065,1950.59 4095,1920.59 U5.6@4095,1900.59 4097.5,1898.09 4097.5,1822.5 v1(4100,1820)
  Bottom Layer w10: R48.1@4091,1715 4091,1808.38 4100,1817.38 v1(4100,1820)
NetCAN2_1: CAN2.1 R49.2 TVS3.2 U6.7 | length 440
  Top Layer w10: CAN2.1@3446.81,1796.38 v1(3447.2,1795.98) CAN2.1@3447.2,1812.38 ; CAN2.1@3446.81,1812.38 CAN2.1@3446.81,1831.4 ; U6.7@3450,1910.59 3449.61,1910.2 3449.7,1891.19 3449.98,1834.98 3450,1831.4 3453.6,1835 3682.58,1835 TVS3.2@3685,1837.42
  Bottom Layer w10: v1(3447.2,1795.98) 3447.2,1793.36 3450,1790.57 R49.2@3450,1710
NetCAN2_2: CAN2.2 R49.1 TVS4.2 U6.6 | length 393
  Top Layer w10: TVS4.2@3215,1847.42 3216.57,1847.42 3249,1815 CAN2.2@3395,1815 ; v1(3392.2,1795.98) CAN2.2@3397.2,1800.98 ; CAN2.2@3400,1820 U6.6@3400,1910.59
  Bottom Layer w10: R49.1@3381,1710 3387.28,1716.28 v1@3387.28,1791.06 ; v1@3387.28,1796.07 v1@3387.28,1791.06 ; v1@3387.73,1796.07 3389.04,1794.76 3389.04,1792.82 v1@3387.28,1791.06 ; v1(3392.2,1795.98) v1@3387.28,1791.06
NetD1_2: D1.2 R23.1 R25.1 R34.1 | length 554.9
  Top Layer w39.37: R23.1@4456,3910 4456,3773.5 4442.5,3760 R25.1@4441,3760 4439.5,3760 4427,3747.5 4427,3746 4422.5,3741.5 D1.2@4422.5,3640 4492.5,3710 4565,3710 4611.86,3756.86 4631.86,3756.86 R34.1@4640,3765
NetD2_1: D2.1 F2.2 Q3.3 | length 499.3
  Top Layer w10: F2.2@4183.43,2875 4190,2868.43 4190,2590 Q3.3@4205,2575
  Bottom Layer w10: F2.2@4183.43,2875 4343.9,2875 v1(4365,2853.9)
NetEARTHNET_10: EARTHNET.10 R12.2 | length 126.7
  Bottom Layer w10: R12.2@1191,2080 1195,2084 EARTHNET.10@1195,2205
NetEARTHNET_11: EARTHNET.11 R13.2 | length 70.4
  Bottom Layer w10: EARTHNET.11@1195,1885 1195,1954 R13.2@1196,1955
NetF1_1: F1.1 Q2.2 | length 266.1
  Top Layer w20: Q2.2@4974.8,3931.8 Q2.2@4983,3940
  Top Layer w39.37: F1.1@4974.8,3677.3 Q2.2@4974.8,3931.8
NetLED1_2: LED1.2 R23.2 R25.2 | length 304.2
  Top Layer w39.37: R25.2@4510,3760 4511.5,3760 4525,3773.5 R23.2@4525,3910 4520,3915 LED1.2@4520,4055
NetPWR1_1: PWR1.1 R64.1 | length 0.6
  Bottom Layer w10: R64.1@4760.83,1658.07 R64.1@4760.83,1658.63
  other v1: 4760,1658.07
NetPWR2_1: PWR2.1 R63.1 | length 12.1
  Top Layer w10: v1(4690,1653.63) 4690.56,1653.63 PWR2.1@4692.5,1655.57
  Bottom Layer w10: R63.1@4686.25,1657.38 4685,1658.63 v1(4690,1653.63)
NetPWR3_1: PWR3.1 R62.1 | length 7.5
  Top Layer w10: PWR3.1@4830,1658.07 v1(4830,1660)
  Bottom Layer w10: v1(4830,1660) 4831.37,1658.63 R62.1@4835,1658.63
NetPWR4_1: PWR4.1 R61.1 | length 8.1
  Top Layer w10: v1(4615,1645) PWR4.1@4615,1653.07
NetPWR5_2: PWR5.2 R52.1 | length 100.7
  Top Layer w10: v1(2260,4495) 2260,4492.38 2270.75,4481.63 2270.75,4472.74 2275.35,4468.15 2281.85,4468.15 PWR5.2@2325,4425
NetPWR6_2: PWR6.2 R19.1 | length 116.9
  Top Layer w10: PWR6.2@1393.07,3805 1404.07,3816 1404.07,3816.47 1460,3872.4 1460,3880 R19.1@1470,3890
NetPWR7_2: PWR7.2 R22.1 | length 137.3
  Top Layer w10: PWR7.2@1395,3720 1400.14,3714.86 1400.14,3694.86 1460,3635 1462,3635 1477.14,3619.86 R22.1@1477.14,3617.86
NetPWR8_2: PWR8.2 R51.1 | length 90.7
  Top Layer w10: PWR8.2@3235,4425 3276.57,4466.57 3276.57,4471.57 3283.15,4478.15 3283.15,4493.15 v1(3285,4495)
NetPWR9_2: PWR9.2 R56.1 | length 106.9
  Top Layer w10: v1(2805,4505) 2805,4503.75 2860.27,4448.48 2860.27,4434.73 PWR9.2@2870,4425
NetPWR10_2: PWR10.2 R20.1 | length 95.7
  Top Layer w10: v1@1705,4500 1706.85,4498.15 1706.85,4493.15 1749.86,4450.14 1749.86,4430.14 PWR10.2@1755,4425
  other v1: 1705,4495
NetPWR11_2: PWR11.2 R57.1 | length 117.7
  Top Layer w10: PWR11.2@2090,4425 2095.14,4430.14 2115.14,4430.14 v1(2179.07,4494.07)
NetPWR12_2: PWR12.2 R53.1 | length 120.4
  Top Layer w10: PWR12.2@2665,4425 2695,4425 2731.85,4461.85 v1@2731.85,4500.15
  other v1: 2730,4497
NetPWR13_2: PWR13.2 R54.1 | length 96.9
  Top Layer w10: v1@1175,4495 1208.43,4461.57 1229,4441 1229,4436 PWR13.2@1240,4425
  other v1: 1174.94,4497.5
NetPWR15_2: PWR15.2 R21.1 | length 116.6
  Top Layer w10: v1(3935,4505) 3935.99,4504.01 3935.99,4490.86 3941.85,4485 3948.07,4485 PWR15.2@4010,4423.07
NetPWR16_2: PWR16.2 R60.1 | length 64.3
  Top Layer w10: PWR16.2@4330,4425 4375,4470 v1(4375,4470.63)
NetPWR17_2: PWR17.2 R55.1 | length 92.8
  Top Layer w10: v1(3390,4490) 3391.85,4488.15 3396.85,4488.15 3439,4446 3439,4436 PWR17.2@3450,4425
NetPWR18_2: PWR18.2 R59.1 | length 91.9
  Top Layer w10: PWR18.2@3805,4425 3863.15,4483.15 3863.15,4490.15 v1(3865,4492)
NetPWR19_2: PWR19.2 R65.1 | length 118.4
  Top Layer w10: PWR19.2@1535,4425 1551.93,4425 1606.29,4479.37 1606.29,4501.29 v1(1608.15,4503.15)
NetQ1_1: Q1.1 R34.2 | length 206.5
  Top Layer w39.37: Q1.1@4633,3940 4633.31,3939.69 4633.31,3927.52 4635,3925.84 4635,3885 4709,3811 R34.2@4709,3765
NetQ1_2: Q1.2 Q2.1 R36.2 R38.2 | length 523
  Top Layer w39.37: Q1.2@4708,3940 4804,3940 R36.2@4810,3946 ; R38.2@4781,3640 4781,3915.5 4810,3944.5 R36.2@4810,3946 ; Q2.1@4908,3940 4816,3940 R36.2@4810,3946
NetQ3_1: Q3.1 R35.2 R37.2 | length 337.3
  Top Layer w10: Q3.1@4168,2495 4210.5,2537.5 4226.64,2537.5 4254.14,2565 4395.06,2565 4398.47,2561.59 4423.72,2561.59 4427.13,2558.19 4432.44,2558.19 4453.13,2537.5 R35.2@4464.94,2537.5
NetR1_2: R1.2 U1.12 | length 632
  Top Layer w10: R1.2@2210,2756 2210,2754.5 2398.06,2566.44 U1.12@2398.06,2201.94
NetR2_2: R2.2 U1.24 | length 571
  Top Layer w10: U1.24@2496.49,2036.49 2552.97,2036.49 2564.46,2025 2714,2025 2946,1793 2947.5,1793 2960,1780.5 R2.2@2960,1779
NetR24_2: R24.2 R29.1 U2.6 USART5.3 | length 362.5
  Top Layer w10: U2.6@3630,4464.41 3632.5,4466.91 3632.5,4562.5 v1(3635,4565)
  Bottom Layer w10: R29.1@3640,4525 3635,4530 v1(3635,4565) 3685,4615 3810,4615 3811,4616 3812.5,4616 3825,4628.5 R24.2@3825,4630
NetR26_1: R26.1 R27.2 U3.7 USART3.2 | length 379
  Top Layer w10: v1(2460,4575) 2468.37,4566.63 2468.37,4471.63 U3.7@2470,4470
  Bottom Layer w10: R26.1@2275,4631 2275,4629.5 2340,4564.5 2424.63,4564.5 2435.13,4575 v1(2460,4575) 2460,4530 R27.2@2465,4525
NetR27_1: R27.1 R32.2 U3.6 USART3.3 | length 396.1
  Top Layer w10: v1(2515,4570) 2517.98,4567.02 2517.98,4472.02 U3.6@2520,4470
  Bottom Layer w10: R27.1@2534,4525 2532.5,4525 2520,4537.5 2520,4539 2515,4544 v1(2515,4570) 2576,4631 R32.2@2730,4631
NetR28_1: R28.1 R29.2 U2.7 USART5.2 | length 363.1
  Top Layer w10: U2.7@3580,4464.41 3582.89,4467.3 3582.89,4552.11 v1(3580,4555)
  Bottom Layer w10: R28.1@3376,4631 3376,4629.5 3388.5,4617 3390,4617 3452,4555 v1(3580,4555) 3580,4534 R29.2@3571,4525